# Altium PCB {TEX137}_F2837x_controlCARD_R1.3_PCB_PADS.PcbDoc (part 5 of 6)
Units mm, origin at the board's own origin, x right, y up, seen from the top; angles counter-clockwise.
Board outline 105.77 x 51.09 mm, 10 copper layers (Primary Side, Inner Layer 2, Inner Layer 3, Inner Layer 4, Inner Layer 5, Inner Layer 6, Inner Layer 7, Inner Layer 8, Inner Layer 9, Secondary Side), stack 1.634 mm thick; 292 components, 317 nets, 1400 pads, 1032 vias.
Unrouted connection lines stored in the file: 106.
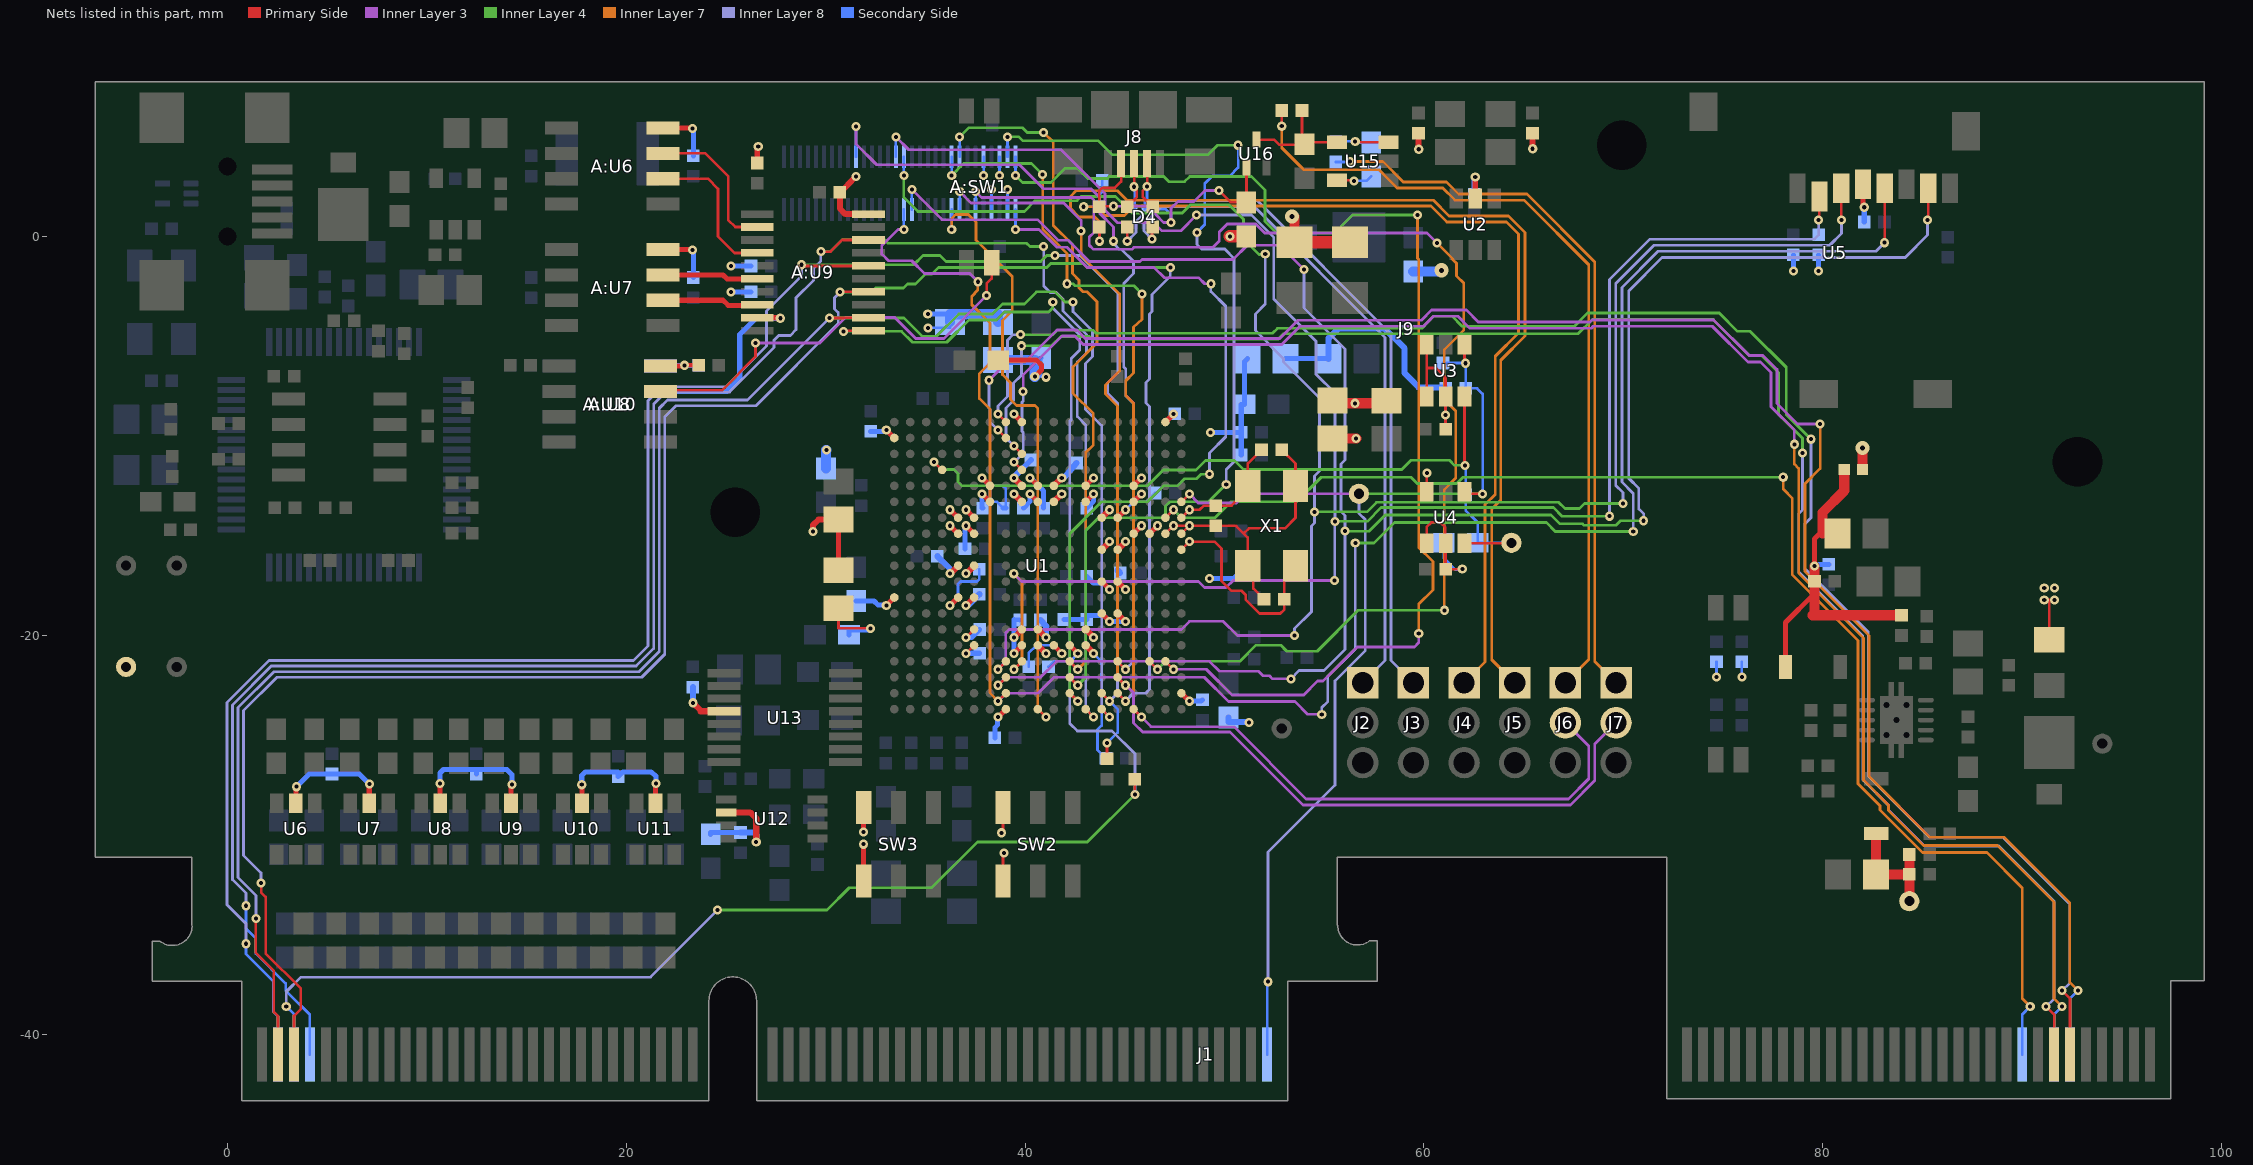
[diagram p13: the nets of this part, all layers, seen from the top]

## Via types
v1: diameter 0.457, hole 0.203, Primary Side to Secondary Side, 1025 vias
v2: diameter 0.711, hole 0.254, Primary Side to Secondary Side, 7 vias

## Nets (pads, with @x,y where several pads share a name; then routed paths per layer and width w, separated by ;. In a path a pad name is that pad's centre, name@x,y a point inside that pad or via, vN(x,y) a via of type N, cw(c..) or ccw(c..) an arc to the next point about the centre after c; other vN are vias at no path point) (continued)
MCU_GPIO-115: J9.59 U1.V12 | length 39.5
  Primary Side w0.135: U1.V12@42.24,-22.91 v1(42.64,-23.31)
  Inner Layer 3 w0.14: v1(39.521,0.352) 40.695,0.352 41.593,-0.547 42.101,-0.547 43.117,-1.563 46.47,-1.563 46.978,-2.071 48.705,-2.071 49.01,-2.376 v1(49.315,-2.376)
  Inner Layer 4 w0.14: v1(42.64,-23.31) 42.24,-22.91 42.24,-14.91 43.839,-13.311 46.141,-13.311 46.941,-12.51 47.641,-12.51 47.997,-12.155 48.59,-12.155 48.819,-11.926 v1(49.251,-11.926)
  Inner Layer 8 w0.14: v1(49.251,-11.926) 49.251,-10.859 50.064,-10.047 50.064,-3.507 49.315,-2.758 v1(49.315,-2.376)
  Secondary Side w0.135: J9.59@39.52,1.352 39.52,0.353 v1(39.521,0.352)
MCU_GPIO-116: J9.43 U1.W10 | length 30.8
  Primary Side w0.114: U1.W10@40.64,-23.71 v1(41.04,-24.11)
  Inner Layer 7 w0.14: v1(36.321,0.352) 36.321,0.902 36.517,1.098 37.152,1.098 37.533,0.717 37.533,-0.189 39.358,-2.015 39.358,-3.721 38.862,-4.217 38.862,-6.935 39.268,-7.341 39.268,-8.179 39.573,-8.484 40.502,-8.484 40.64,-8.622 40.64,-23.71 v1(41.04,-24.11)
  Secondary Side w0.135: J9.43@36.32,1.352 36.32,0.353 v1(36.321,0.352)
MCU_GPIO-117: J9.58 U1.U12 | length 49.9
  Primary Side w0.135: U1.U12@42.24,-22.11 v1(42.64,-22.51)
  Inner Layer 4 w0.14: v1(39.121,4.992) 39.688,4.992 39.88,4.8 43.663,4.8 44.374,4.089 49.162,4.089 49.645,4.571 v1(50.686,4.571) ; v1(42.64,-22.51) 43.041,-22.109 43.041,-14.744 43.674,-14.111 46.841,-14.111 47.041,-13.911 47.041,-13.526 47.256,-13.312 49.186,-13.312 50.064,-12.434 v1(50.089,-12.434)
  Inner Layer 8 w0.14: v1(48.615,0.19) 48.615,-0.407 48.844,-0.636 50.012,-0.636 50.482,-1.106 50.482,-11.304 50.089,-11.697 v1(50.089,-12.434)
  Secondary Side w0.135: J9.58@39.12,3.992 v1(39.121,4.992) ; v1(48.615,0.19) 49.01,0.585 49.01,2.642 49.402,3.034 50.266,3.034 50.686,3.454 v1(50.686,4.571)
MCU_GPIO-118: J9.46 U1.T12 | length 35.5
  Primary Side w0.135: U1.T12@42.24,-21.31 v1(42.64,-21.71)
  Inner Layer 4 w0.14: v1(36.72,4.992) 37.181,5.452 39.86,5.452 40.106,5.206 v1(40.932,5.206)
  Inner Layer 7 w0.14: v1(40.932,5.206) 41.415,4.724 41.415,0.546 42.376,-0.415 42.376,-1.868 42.711,-2.203 42.711,-2.579 42.914,-2.782 43.117,-2.782 43.613,-3.277 43.613,-5.335 42.406,-6.541 42.406,-7.876 43.421,-8.891 43.421,-10.466 43.04,-10.847 43.04,-21.31 v1(42.64,-21.71)
  Secondary Side w0.135: J9.46@36.72,3.992 v1(36.72,4.992)
MCU_GPIO-119: J9.20 U1.T15 | length 41.3
  Primary Side w0.135: U1.T15@44.64,-21.31 v1(45.04,-21.71)
  Inner Layer 3 w0.14: v1(31.52,5.516) 31.52,4.633 32.561,3.592 39.715,3.592 40.92,2.387 43.308,2.387 43.746,1.949 43.746,1.162 44.438,0.469 v1(44.438,-0.242)
  Inner Layer 8 w0.14: v1(44.438,-0.242) 44.438,-0.344 44.743,-0.649 44.845,-0.649 45.441,-1.245 45.441,-1.868 44.946,-2.362 44.946,-6.541 45.048,-6.643 45.048,-7.977 45.441,-8.37 45.441,-21.31 v1(45.04,-21.71)
  Secondary Side w0.135: J9.20@31.52,3.992 v1(31.52,5.516)
MCU_GPIO-120: J7.2 J9.45 U1.U15 | length 63.7
  Primary Side w0.142: U1.U15@44.64,-22.11 v1(45.04,-22.51)
  Inner Layer 3 w0.14: v1(36.721,2.252) 37.298,1.675 41.936,1.675 42.813,0.799 v1(42.813,0.266) ; 45.441,-24.395 45.441,-22.884
  Inner Layer 3 w0.142: v1(45.04,-22.51) 45.067,-22.51 45.441,-22.884 ; 45.441,-24.395 45.9,-24.854 50.28,-24.854 53.937,-28.512 67.348,-28.512 68.568,-27.293 68.568,-25.458 J7.2@69.635,-24.391
  Inner Layer 7 w0.14: v1(42.813,0.266) 42.813,-0.953 44.743,-2.884 44.743,-6.745 44.032,-7.456 44.032,-7.902 44.64,-8.51 44.64,-22.174 v1(45.04,-22.51)
  Secondary Side w0.135: J9.45@36.72,1.352 v1(36.721,2.252)
MCU_GPIO-121: J6.2 J9.44 U1.W16 | length 66.2
  Primary Side w0.142: U1.W16@45.44,-23.71 v1(45.84,-24.11)
  Inner Layer 3 w0.142: v1(45.84,-24.11) 46.317,-24.587 50.469,-24.587 54.09,-28.207 67.252,-28.207 68.263,-27.196 68.263,-25.559 J6.2@67.095,-24.391
  Inner Layer 4 w0.14: v1(36.321,3.052) 36.921,3.652 40.327,3.652 v1(40.881,3.098) ; v1(42.101,-2.376) 42.406,-2.376 42.508,-2.477 45.454,-2.477 v1(45.861,-2.884)
  Inner Layer 7 w0.14: v1(40.881,3.098) 40.881,0.369 42.101,-0.852 v1(42.101,-2.376) ; v1(45.84,-24.11) 45.441,-23.711 45.441,-8.37 45.048,-7.977 45.048,-7.239 45.441,-6.846 45.441,-4.547 45.861,-4.166 v1(45.861,-2.884)
  Secondary Side w0.135: v1@36.32,3.052 J9.44@36.32,3.992
MCU_GPIO-122: J9.32 U1.T8 U5.3 | length 103.7
  Primary Side w0.135: v1(38.64,-21.71) U1.T8@39.04,-21.31 ; U5.3@80.924,2.413 80.924,0.826 v1(80.938,0.826)
  Inner Layer 3 w0.14: v1(38.64,-21.71) 39.028,-21.322 39.028,-19.875 39.193,-19.71 47.843,-19.71 48.248,-19.304 49.937,-19.304 50.649,-20.016 v1(53.518,-20.016)
  Inner Layer 4 w0.14: v1(33.921,3.052) 33.921,1.952 34.621,1.252 39.968,1.252 40.506,1.79 42.609,1.79 42.813,1.993 44.54,1.993 45.365,1.168 47.88,1.168 48.299,1.587 50.229,1.587 50.96,0.856 50.96,-0.122 51.74,-0.902 52.032,-0.902 v1(52.044,-0.89) ; v1(54.509,-13.813) 57.14,-13.813 57.615,-13.338 66.764,-13.338 67.079,-13.652 67.806,-13.652 68.06,-13.398 v1(69.991,-13.398)
  Inner Layer 8 w0.14: v1(52.044,-0.89) 52.044,-3.392 51.55,-3.886 51.55,-4.725 52.96,-6.135 52.96,-6.3 54.763,-8.103 54.763,-11.76 54.509,-12.014 v1(54.509,-13.813) 54.509,-14.377 54.356,-14.53 54.356,-18.821 53.505,-19.672 53.505,-20.168 v1(53.518,-20.016) ; v1(69.991,-13.398) 69.991,-12.852 69.622,-12.484 69.622,-2.362 71.54,-0.444 80.354,-0.444 80.938,0.14 v1(80.938,0.826)
  Secondary Side w0.135: v1(33.921,3.052) J9.32@33.921,3.992
MCU_GPIO-123: J9.33 U1.U8 U5.7 | length 108.5
  Primary Side w0.135: v1(38.64,-22.51) U1.U8@39.04,-22.11 ; v1(85.256,0.826) 85.293,0.826 U5.7@85.293,2.413
  Inner Layer 3 w0.14: v1(34.321,2.352) 35.835,0.837 40.616,0.837 41.644,-0.191 42.152,-0.191 43.219,-1.258 45.759,-1.258 45.861,-1.157 50.433,-1.157 51.144,-0.445 52.769,-0.445 v1(53.989,-1.665) ; v1(38.64,-22.51) 39.04,-22.11 40.78,-22.11 41.58,-21.31 49.252,-21.31 49.748,-21.806 51.701,-21.806 51.929,-22.035 52.26,-22.035 52.412,-22.187 v1(53.326,-22.187)
  Inner Layer 4 w0.14: v1(56.048,-14.783) 56.04,-14.79 56.04,-14.787 57.247,-14.787 58.064,-13.971 66.372,-13.971 66.815,-14.414 67.948,-14.414 68.022,-14.488 69.637,-14.488 69.864,-14.262 v1(71.019,-14.262)
  Inner Layer 8 w0.14: v1(53.326,-22.187) 53.745,-21.768 54.99,-21.768 56.048,-20.71 v1(56.048,-14.783) 56.048,-14.004 55.848,-13.804 55.848,-11.409 56.048,-11.209 56.048,-5.642 53.989,-3.583 v1(53.989,-1.665) ; v1(71.019,-14.262) 71.019,-13.906 70.778,-13.665 70.778,-12.636 70.27,-12.128 70.27,-2.73 71.946,-1.054 84.138,-1.054 85.256,0.064 v1(85.256,0.826)
  Secondary Side w0.135: J9.33@34.32,1.352 v1(34.321,2.352)
MCU_GPIO-124: J9.31 U1.V8 U5.5 | length 101.6
  Primary Side w0.135: v1(38.64,-23.31) U1.V8@39.04,-22.91 ; v1(83.097,-0.317) 83.109,-0.305 U5.5@83.109,2.413
  Inner Layer 3 w0.14: v1(33.921,0.352) 33.626,0.352 32.817,-0.458 32.817,-0.89 33.147,-1.22 34.315,-1.22 34.963,-1.868 37.225,-1.868 v1(37.631,-2.274) ; v1(38.64,-23.31) 39.039,-22.911 40.653,-22.911 41.454,-22.11 48.983,-22.11 50.203,-23.33 53.531,-23.33 54.166,-23.965 54.864,-23.965 v1(54.877,-23.978)
  Inner Layer 4 w0.14: v1(56.558,-15.375) 56.558,-15.38 57.498,-15.38 58.526,-14.352 66.143,-14.352 66.586,-14.795 v1(70.499,-14.795)
  Inner Layer 7 w0.14: v1(37.631,-2.274) 37.631,-2.68 37.325,-3.023 37.325,-3.43 38.24,-4.349 38.24,-6.35 37.706,-6.884 37.706,-8.128 38.24,-8.662 38.24,-22.897 v1(38.64,-23.31)
  Inner Layer 8 w0.14: v1(54.877,-23.978) 54.877,-23.634 55.181,-23.33 55.181,-22.059 56.558,-20.682 v1(56.558,-15.375) ; v1(70.499,-14.795) 70.499,-12.89 69.927,-12.319 69.927,-2.565 71.743,-0.749 82.665,-0.749 v1(83.097,-0.317)
  Secondary Side w0.135: v1@33.92,0.352 J9.31@33.92,1.352
MCU_GPIO-125: J9.30 R15.2 U1.T9 U5.2 | length 104.1
  Primary Side w0.135: v1(39.44,-21.71) U1.T9@39.84,-21.31 ; v1(79.795,0.826) 79.832,0.953 U5.2@79.832,2.007
  Inner Layer 3 w0.14: v1(33.52,4.992) 34.169,4.343 41.808,4.343 44.006,2.145 44.006,1.307 44.628,0.685 46.457,0.685 46.864,0.279 47.804,0.279 v1(48.604,1.079) ; v1(39.434,-16.916) 39.824,-17.306 48.696,-17.306 48.999,-17.61 50.081,-17.61 50.44,-17.251 v1(55.524,-17.251)
  Inner Layer 4 w0.14: v1(55.538,-14.29) 57.162,-14.29 57.856,-13.597 66.492,-13.597 66.928,-14.033 v1(69.305,-14.033)
  Inner Layer 7 w0.14: v1(39.434,-16.916) 39.84,-17.322 39.84,-21.31 v1(39.44,-21.71)
  Inner Layer 8 w0.14: v1(48.604,1.079) 51.347,1.079 52.465,-0.039 52.465,-3.131 54.592,-5.259 54.592,-6.913 55.538,-7.859 v1(55.538,-14.29) 55.524,-14.305 v1(55.524,-17.251) ; v1(69.305,-14.033) 69.305,-2.171 71.337,-0.139 79.592,-0.139 79.795,0.064 v1(79.795,0.826)
  Secondary Side w0.135: J9.30@33.52,3.992 v1(33.52,4.992) ; R15.2@79.795,0.088 v1(79.795,0.826)
MCU_GPIO-133: J1.164 U1.G18 | length 68.5
  Primary Side w0.135: U1.G18@47.04,-14.11 v1(47.44,-13.71)
  Inner Layer 4 w0.14: v1(47.44,-13.71) 47.84,-14.11 49.517,-14.11 50.318,-13.309 53.62,-13.309 54.852,-12.077 59.347,-12.077 59.665,-12.396 61.644,-12.396 61.963,-12.077 v1(78.017,-12.077)
  Inner Layer 7 w0.14: v1(78.017,-12.077) 78.017,-12.677 78.476,-13.136 78.476,-16.974 81.762,-20.259 81.762,-27.448 82.868,-28.555 82.868,-28.765 85.002,-30.899 88.228,-30.899 90.003,-32.674 90.003,-38.223 v1(90.404,-38.623)
  Secondary Side w0.135: J1.164@90.005,-41.024 90.005,-39.022 v1(90.404,-38.623)
MCU_GPIO-136: J9.49 U1.T17 | length 64.4
  Primary Side w0.135: U1.T17@46.24,-21.31 v1(46.64,-21.71)
  Inner Layer 3 w0.14: v1(37.521,2.252) 37.818,1.955 43.308,1.955 43.448,1.815 43.448,0.19 43.219,-0.039 43.219,-0.445 43.422,-0.649 45.353,-0.649 45.454,-0.547 49.427,-0.547 49.732,-0.242 49.732,0.207 50.138,0.614 51.568,0.614 52.018,0.164 60.161,0.164 v1(60.655,-0.33)
  Inner Layer 4 w0.14: v1(46.64,-21.71) 47.04,-21.31 50.762,-21.31 51.574,-20.498 52.82,-20.498 53.124,-20.803 54.648,-20.803 56.701,-18.751 v1(61.024,-18.751)
  Inner Layer 7 w0.14: v1(60.655,-0.33) 61.455,-1.13 61.417,-1.13 61.633,-1.346 61.633,-1.981 62.001,-2.349 62.001,-4.687 61.024,-5.664 61.024,-8.175 61.594,-8.744 61.594,-12.127 61.024,-12.696 v1(61.024,-18.751)
  Secondary Side w0.135: J9.49@37.52,1.352 v1(37.521,2.252)
MCU_GPIO-137: J9.60 U1.T18 | length 61
  Primary Side w0.135: U1.T18@47.04,-21.31 v1(47.44,-21.71)
  Inner Layer 3 w0.14: v1(47.44,-21.71) 49.085,-21.71 50.375,-23 53.974,-23 54.673,-22.302 54.939,-22.302 56.655,-20.586 59.525,-20.586 59.742,-20.37 v1(59.742,-19.91)
  Inner Layer 4 w0.14: v1(39.521,3.052) 39.868,2.706 41.29,2.706 42,3.415 42.621,3.415 43.129,2.907 44.133,2.907 44.222,2.996 46.952,2.996 47.206,2.742 47.994,2.742 48.261,3.009 51.347,3.009 52.026,2.33 52.026,0.742 52.604,0.164 55.513,0.164 56.427,1.079 v1(59.678,1.079)
  Inner Layer 7 w0.14: v1(59.678,1.079) 59.678,-1.093 59.742,-1.157 59.742,-15.596 60.452,-16.307 60.452,-17.731 59.742,-18.441 v1(59.742,-19.91)
  Secondary Side w0.135: J9.60@39.52,3.992 39.52,3.052 v1(39.521,3.052)
MCU_GPIO-161: J1.167 U1.C9 | length 88.4
  Primary Side w0.135: v1(39.44,-10.51) U1.C9@39.84,-10.91 ; v1(91.204,-38.623) 91.603,-39.023 J1.167@91.603,-41.024
  Inner Layer 4 w0.14: v1(39.827,-5.487) 41.327,-5.487 41.797,-5.017 43.219,-5.017 43.36,-5.159 52.691,-5.159 52.97,-4.879 67.74,-4.879 68.448,-4.171 74.505,-4.171 76.323,-5.989 76.958,-5.989 77.788,-6.819 77.788,-8.928 78.982,-10.121 v1(78.982,-10.858)
  Inner Layer 8 w0.14: v1(39.44,-10.51) 39.04,-10.11 39.04,-8.61 39.21,-8.439 39.421,-8.229 39.421,-7.36 39.819,-6.962 39.819,-6.162 39.827,-5.781 v1(39.827,-5.487) ; v1(78.982,-10.858) 78.982,-13.728 78.792,-13.918 78.792,-16.817 82.003,-20.028 82.003,-27.232 83.3,-28.529 83.3,-28.765 85.104,-30.568 88.835,-30.568 91.604,-33.337 91.604,-38.236 v1(91.204,-38.623)
MCU_GPIO-162: J1.168 U1.D9 | length 88.1
  Primary Side w0.135: v1(39.44,-11.31) U1.D9@39.84,-11.71
  Inner Layer 3 w0.14: v1(39.903,-7.773) 39.903,-6.947 41.852,-4.998 42.489,-4.998 42.914,-5.424 52.871,-5.424 53.785,-4.509 59.983,-4.509 60.491,-4.001 61.698,-4.001 62.307,-4.611 68.389,-4.611 68.492,-4.508 74.461,-4.508 76.249,-6.296 76.884,-6.296 77.407,-6.819 77.407,-8.547 78.576,-9.715 v1(78.576,-10.426)
  Inner Layer 7 w0.14: v1(78.576,-10.426) 78.576,-11.419 78.794,-11.637 78.794,-16.887 82.041,-20.135 82.041,-27.27 83.3,-28.529 83.3,-28.79 85.053,-30.543 88.761,-30.543 91.604,-33.386 91.604,-38.223 v1(92.004,-38.623)
  Inner Layer 8 w0.14: v1(39.44,-11.31) 39.903,-10.91 39.903,-9.83 39.852,-9.78 39.852,-8.306 39.903,-8.256 v1(39.903,-7.773)
  Secondary Side w0.135: J1.168@91.605,-41.024 91.605,-39.022 v1(92.004,-38.623)
MCU_GPIO-163: J1.169 U1.A8 | length 88.8
  Primary Side w0.135: v1(38.641,-8.91) U1.A8@39.04,-9.31 ; v1(92.004,-37.823) 92.403,-38.223 J1.169@92.403,-41.024
  Inner Layer 4 w0.14: v1(39.776,-4.928) 41.39,-4.928 41.606,-4.713 43.422,-4.713 43.569,-4.859 52.404,-4.859 52.652,-4.611 59.89,-4.611 60.487,-4.001 61.407,-4.001 61.913,-4.508 67.547,-4.508 68.212,-3.843 74.812,-3.843 75.731,-4.762 76.366,-4.762 78.169,-6.565 78.169,-8.928 v1(79.414,-10.172)
  Inner Layer 8 w0.14: v1(38.641,-8.91) 38.641,-8.51 39.116,-8.035 39.116,-5.208 39.395,-4.928 v1(39.776,-4.928) ; v1(79.414,-10.172) 79.414,-14.109 79.097,-14.426 79.097,-16.665 82.283,-19.85 82.283,-27.054 85.365,-30.137 89.038,-30.137 92.391,-33.489 92.391,-37.436 v1(92.004,-37.823)
MCU_GPIO-164: J1.170 U1.B8 | length 90.1
  Primary Side w0.135: v1(38.641,-9.71) U1.B8@39.04,-10.11
  Inner Layer 3 w0.14: v1(38.189,-7.214) 39.097,-6.306 39.991,-6.306 41.598,-4.7 42.596,-4.7 43.016,-5.119 52.769,-5.119 53.684,-4.205 59.881,-4.205 60.389,-3.697 62.129,-3.697 62.726,-4.293 68.326,-4.293 68.423,-4.196 74.53,-4.196 76.313,-5.979 77.011,-5.979 77.7,-6.667 77.7,-8.382 78.728,-9.41 v1(79.871,-9.41)
  Inner Layer 7 w0.14: v1(79.871,-9.41) 79.871,-11.645 79.109,-12.407 79.109,-16.799 82.321,-20.011 82.321,-27.074 85.383,-30.137 89.103,-30.137 92.39,-33.423 92.39,-37.423 92.404,-37.423 v1(92.804,-37.823)
  Inner Layer 8 w0.14: v1@38.188,-7.215 38.188,-8.636 38.24,-8.688 38.24,-9.309 v1(38.641,-9.71)
  Secondary Side w0.135: J1.170@92.405,-41.024 92.405,-38.222 v1(92.804,-37.823)
MCU_GPIO-168: C5.2 R19.2 TP3.1 U1.D4 U3.6 U4.6 | length 40.6
  Primary Side w0.135: v1(35.44,-11.31) U1.D4@35.84,-11.71 ; U4.6@62.037,-15.392 64.364,-15.392 TP3.1@64.389,-15.367 ; U3.6@62.037,-8.026 62.037,-11.453 v1(62.065,-11.481)
  Inner Layer 4 w0.14: v1(35.44,-11.31) 35.826,-11.696 36.439,-11.696 36.639,-11.896 36.639,-12.31 36.839,-12.51 46.127,-12.51 46.928,-11.709 48.578,-11.709 49.046,-11.24 50.497,-11.24 50.953,-11.696 58.89,-11.696 59.359,-11.227 61.278,-11.227 61.532,-11.481 v1(62.065,-11.481)
  Secondary Side w0.135: v1(62.065,-11.481) 62.103,-11.519 C5.2@62.103,-12.954 62.091,-12.966 62.091,-13.742 62.7,-14.352 R19.2@62.7,-15.367 TP3.1@64.389,-15.367
MCU_TCK: A:U9.14 J1.5 U1.V15 | length 107.6
  Primary Side w0.135: v1(1.69,-32.424) 1.69,-32.896 1.918,-33.124 1.918,-35.96 3.68,-37.722 3.68,-38.741 3.335,-39.085 J1.5@3.335,-41.024 ; v1(30.723,-2.797) 30.738,-2.781 A:U9.14@32.158,-2.781 ; U1.V15@44.64,-22.91 v1(45.04,-23.31)
  Inner Layer 4 w0.14: v1(30.723,-2.797) 31.649,-2.797 31.784,-2.662 32.44,-2.662 32.51,-2.592 33.903,-2.592 34.106,-2.388 34.506,-2.388 35.002,-1.893 35.326,-1.893 35.656,-1.563 41.085,-1.563 41.289,-1.36 42.914,-1.36 43.117,-1.563 v1(47.283,-1.563)
  Inner Layer 8 w0.14: v1(1.69,-32.424) 1.69,-31.916 0.814,-31.04 0.814,-23.774 2.477,-22.11 20.778,-22.11 21.933,-20.955 21.933,-9.05 22.492,-8.491 26.512,-8.491 30.626,-4.377 30.626,-3.818 30.441,-3.633 30.441,-3.078 v1(30.723,-2.797) ; v1(45.04,-23.31) 45.426,-22.91 46.049,-22.91 46.24,-22.719 46.241,-8.535 46.063,-8.357 46.063,-7.329 46.241,-7.15 46.241,-3.893 46.369,-3.765 46.369,-2.91 47.283,-1.995 v1(47.283,-1.563)
MCU_TDI: A:U9.18 J1.8 U1.W13 | length 107
  Primary Side w0.135: v1(29.758,-0.765) 30.24,-0.765 30.824,-0.181 A:U9.18@32.158,-0.181 ; U1.W13@43.04,-23.71 v1(43.44,-24.11)
  Inner Layer 4 w0.14: v1(29.758,-0.765) 30.249,-0.765 30.849,-0.165 32.94,-0.165 33.119,-0.344 40.08,-0.344 40.244,-0.509 40.908,-0.509 v1(40.933,-0.509)
  Inner Layer 8 w0.14: v1(0.928,-33.567) 0.928,-32.932 0.255,-32.259 0.255,-23.494 2.198,-21.551 20.499,-21.551 21.374,-20.676 21.374,-8.416 21.967,-7.823 25.171,-7.812 27.406,-5.577 27.406,-5.208 27.648,-4.966 28.232,-4.966 28.518,-4.679 28.518,-3.08 29.388,-2.21 29.388,-1.614 29.758,-1.244 v1(29.758,-0.765) ; v1(40.933,-0.509) 40.933,-2.477 41.263,-2.808 41.568,-2.808 41.898,-3.138 41.898,-3.736 43.078,-4.916 43.078,-5.849 42.621,-6.307 42.621,-9.031 43.04,-9.45 43.04,-23.71 v1(43.44,-24.11)
  Secondary Side w0.135: v1(0.928,-33.567) 0.928,-34.71 1.427,-35.209 1.427,-35.971 2.921,-37.465 2.921,-37.819 4.135,-39.033 J1.8@4.135,-41.024
MCU_TDO: A:U9.11 J1.6 R10.1 | length 91.6
  Primary Side w0.135: v1(30.9,-4.762) 30.931,-4.731 A:U9.11@32.158,-4.731 ; v1(45.505,-27.979) R10.1@45.505,-27.217
  Inner Layer 4 w0.14: v1(24.571,-33.785) 30.058,-33.785 31.181,-32.662 35.316,-32.662 37.613,-30.365 43.119,-30.365 v1(45.505,-27.979) ; v1(30.9,-4.762) 33.806,-4.762 34.353,-5.309 36.072,-5.309 37.19,-4.192 38.57,-4.192 38.963,-3.798 41.187,-3.798 41.39,-3.595 41.39,-3.324 v1(41.39,-3.29)
  Inner Layer 8 w0.14: v1(2.951,-38.611) 2.951,-37.879 3.683,-37.147 21.209,-37.147 v1(24.571,-33.785) ; v1(41.39,-3.29) 41.39,-3.596 42.74,-4.946 42.74,-5.694 42.316,-6.118 42.316,-9.196 42.24,-9.272 42.24,-24.423 42.621,-24.804 44.363,-24.804 45.505,-25.946 v1(45.505,-27.979)
  Secondary Side w0.135: v1(2.951,-38.611) 3.335,-38.992 J1.6@3.335,-41.024
MCU_TMS: A:U9.12 J1.3 U1.W14 | length 101.2
  Primary Side w0.135: v1(1.427,-34.202) 1.427,-35.928 2.328,-36.829 2.328,-38.9 2.535,-39.106 J1.3@2.535,-41.024 ; v1(30.189,-4.092) 30.889,-4.092 30.9,-4.081 A:U9.12@32.158,-4.081 ; U1.W14@43.84,-23.71 v1(44.24,-24.11)
  Inner Layer 4 w0.14: v1(30.189,-4.092) 33.921,-4.092 34.834,-5.005 35.572,-5.005 36.677,-3.9 38.354,-3.9 38.862,-3.392 39.968,-3.392 40.578,-2.781 41.491,-2.781 42,-3.29 v1(42.406,-3.29)
  Inner Layer 8 w0.14: v1(1.427,-34.202) 1.427,-33.05 0.534,-32.157 0.534,-23.634 2.338,-21.831 20.638,-21.831 21.653,-20.815 21.653,-8.619 22.073,-8.2 26.082,-8.2 v1(30.189,-4.092) ; v1(42.406,-3.29) 42.406,-3.775 43.375,-4.744 43.375,-6.023 43.027,-6.371 43.027,-8.675 43.84,-9.488 43.84,-23.71 v1(44.24,-24.11)
MCU_TRSTN: A:U9.16 J1.4 R9.2 U1.V14 | length 110.6
  Primary Side w0.135: v1(28.791,-1.423) 28.811,-1.481 A:U9.16@32.158,-1.481 ; U1.V14@43.84,-22.91 v1(44.24,-23.31) ; R9.2@44.108,-26.201 v1(44.108,-25.412)
  Inner Layer 4 w0.14: v1(28.791,-1.423) 34.418,-1.423 34.888,-0.953 35.739,-0.953 36.044,-1.258 40.781,-1.258 41.085,-0.953 v1(41.492,-0.953)
  Inner Layer 8 w0.14: v1(0.928,-35.472) 0.928,-34.467 -0.025,-33.514 -0.025,-23.382 2.085,-21.272 20.359,-21.272 21.095,-20.536 21.095,-8.242 21.793,-7.544 24.982,-7.544 27.038,-5.488 27.038,-3.738 28.791,-1.985 v1(28.791,-1.423) ; v1(41.492,-0.953) 42.748,-0.953 44.653,-2.858 44.653,-6.834 44.133,-7.354 44.133,-7.862 44.64,-8.369 44.64,-22.91 v1(44.24,-23.31)
  Secondary Side w0.135: v1(0.928,-35.472) 0.928,-35.98 2.302,-37.354 2.302,-38.886 2.535,-39.119 J1.4@2.535,-41.024 ; v1(44.108,-25.412) 44.641,-24.879 44.641,-23.711 v1(44.24,-23.31)
MCU_X1: C7.2 R24.1 U1.G19 X1.1 | length 6.2
  Primary Side w0.135: U1.G19@47.84,-14.11 v1(48.24,-13.71) 48.756,-13.71 48.965,-13.501 R24.1@49.569,-13.501 50.356,-13.501 51.144,-12.714 51.144,-12.536 X1.1@51.163,-12.517 51.169,-12.511 51.169,-11.393 C7.2@51.855,-10.707
MCU_X2: C8.2 U1.J19 X1.3 | length 10.4
  Primary Side w0.135: U1.J19@47.84,-15.71 v1(48.241,-15.31) 49.498,-15.31 49.848,-15.66 49.848,-17.286 50.331,-17.768 50.839,-17.768 51.068,-17.997 51.068,-18.226 51.753,-18.911 52.795,-18.911 52.998,-18.708 C8.2@52.998,-18.2 52.998,-17.082 X1.3@53.563,-16.517
MCU_XRSN: C3.2 J1.120 R18.2 TP2.1 U1.F19 U3.1 U4.1 | length 56.3
  Primary Side w0.135: U1.F19@47.84,-13.31 v1(48.24,-12.91) ; U4.1@62.037,-12.802 62.037,-12.91 v1(62.943,-12.91) ; U3.1@62.037,-5.436 62.037,-6.308 v1(62.091,-6.362)
  Inner Layer 3 w0.14: v1(48.24,-12.91) 48.256,-12.926 48.687,-13.373 50.598,-13.373 51.061,-12.91 TP2.1@56.743,-12.91
  Inner Layer 4 w0.14: TP2.1@56.743,-12.91 v1(62.943,-12.91)
  Inner Layer 8 w0.14: v1(52.185,-37.376) 52.185,-30.873 55.538,-27.52 55.538,-22.287 57.062,-20.763 57.062,-14.21 56.743,-13.89 TP2.1@56.743,-12.91
  Secondary Side w0.135: J1.120@52.138,-41.024 52.138,-37.376 v1(52.185,-37.376) ; C3.2@60.96,-6.35 62.079,-6.35 v1(62.091,-6.362) 62.103,-6.374 R18.2@62.103,-7.62 62.662,-7.62 62.943,-7.902 v1(62.943,-12.91)
MID_SCI-RX: A:SW1.2 A:U10.7 | length 21.4
  Primary Side w0.135: A:U10.7@21.717,-7.775 21.74,-7.724 24.791,-7.724 26.48,-6.035 v1(26.48,-5.346) ; v1(38.074,-2.972) 38.074,-2.36 38.325,-2.109 A:SW1.2@38.325,-1.33
  Inner Layer 3 w0.14: v1(26.48,-5.346) 29.714,-5.346 30.996,-4.065 33.465,-4.065 34.52,-5.119 35.928,-5.119 v1(38.074,-2.972)
MID_TCK: A:U7.7 A:U9.6 | length 4.8
  Primary Side w0.254: A:U7.7@21.839,-1.933 24.855,-1.933 25.053,-2.131 A:U9.6@26.57,-2.131
MID_TDI: A:U6.7 A:U9.2 | length 7.5
  Primary Side w0.135: A:U6.7@21.839,4.163 23.966,4.163 25.109,3.02 25.109,0.828 25.468,0.469 A:U9.2@26.57,0.469
MID_TDO: A:U8.2 A:U9.9 | length 10
  Primary Side w0.254: A:U9.9@26.57,-4.081 27.699,-4.081 v1(27.724,-4.106)
  Secondary Side w0.254: A:U8.2@21.712,-7.775 25.03,-7.775 25.693,-7.112 25.693,-4.919 26.506,-4.106 v1(27.724,-4.106)
MID_TMS: A:U7.6 A:U9.8 | length 4.8
  Primary Side w0.254: A:U7.6@21.839,-3.203 24.855,-3.203 25.109,-3.457 26.544,-3.457 A:U9.8@26.57,-3.431
MID_TRSTN: A:U6.6 A:U9.4 | length 7.7
  Primary Side w0.135: A:U6.6@21.839,2.893 24.093,2.893 24.601,2.385 24.601,0.003 25.435,-0.831 A:U9.4@26.57,-0.831
OSC_GND: C7.1 C8.1 R24.2 U1.H18 U1.H19 X1.2 X1.4 | length 15.9
  Primary Side w0.135: U1.H18@47.04,-14.91 v1(47.44,-14.51) v1(48.24,-14.51) ; U1.H19@47.84,-14.91 v1(48.24,-14.51) ; C8.1@51.982,-18.2 51.449,-17.667 51.449,-16.6 51.169,-16.6 51.169,-16.523 X1.2@51.163,-16.517 51.163,-15.101 50.579,-14.517 ; C7.1@52.871,-10.707 53.563,-11.399 X1.4@53.563,-12.517 53.563,-14.111 53.03,-14.644 51.22,-14.644 50.963,-14.901 50.579,-14.517 ; v1(48.24,-14.51) 49.562,-14.51 R24.2@49.569,-14.517 50.579,-14.517
USB0_EPEN: J6.1 R81.1 | length 41.1
  Primary Side w0.142: v1(52.871,5.525) R81.1@52.871,6.311
  Inner Layer 7 w0.142: v1(52.871,5.525) 52.871,4.443 53.974,3.34 57.747,3.34 58.662,2.425 60.948,2.425 61.557,1.816 65.026,1.816 68.263,-1.421 68.263,-21.223 J6.1@67.095,-22.391
USB0_GPIO-42: J2.1 R76.1 | length 34.5
  Primary Side w0.142: v1(46.369,-0.141) 46.369,0.469 R76.1@46.394,0.469
  Inner Layer 8 w0.142: v1(46.369,-0.141) 45.962,0.266 45.962,0.647 46.8,1.485 51.499,1.485 58.053,-5.068 58.053,-21.273 J2.1@56.935,-22.391
USB0_GPIO-43: J3.1 R77.1 | length 35.8
  Primary Side w0.142: v1(45.124,-0.242) R77.1@45.124,0.469
  Inner Layer 8 w0.142: v1(45.124,-0.242) 45.556,0.19 45.556,0.748 46.597,1.79 51.652,1.79 58.357,-4.916 58.357,-21.273 J3.1@59.475,-22.391
USB0_GPIO-46: J4.1 R79.1 R80.1 | length 48.6
  Inner Layer 7 w0.14: v1(42.94,1.485) 43.573,1.485 44.005,1.041 44.983,1.041 45.466,1.524 60.35,1.524 61.149,0.726 64.144,0.726 64.744,0.126 64.744,-4.843 63.578,-6.009 63.578,-12.94 63.07,-13.448 63.07,-21.336 J4.1@62.015,-22.391
  Secondary Side w0.135: v1(42.94,1.485) 42.953,1.499 R80.1@43.727,1.485 43.727,2.083 43.866,2.222 R79.1@43.866,2.819
USB0_GPIO-47: J5.1 R82.1 | length 51.5
  Primary Side w0.142: v1(43.727,-0.242) R82.1@43.727,0.469
  Inner Layer 7 w0.142: v1(43.727,-0.242) 43.727,0.747 43.497,0.977 42.71,0.977 42.278,1.409 42.278,2.006 42.557,2.285 44.628,2.285 45.098,1.816 60.465,1.816 61.265,1.015 64.244,1.015 65.067,0.192 65.067,-4.998 63.856,-6.21 63.856,-13.222 63.398,-13.679 63.398,-21.234 J5.1@64.555,-22.391
USB0_PFLT: J7.1 R78.1 | length 36.6
  Inner Layer 7 w0.142: v1(56.3,3.747) 57.949,3.747 58.966,2.73 61.127,2.73 61.737,2.12 65.166,2.12 68.568,-1.282 68.568,-21.324 J7.1@69.635,-22.391
  Secondary Side w0.142: R78.1@55.577,3.732 56.285,3.732 v1(56.3,3.747)
USB-DM: D4.2 J8.2 R76.2 | length 3.6
  Primary Side w0.127: J8.2@46.116,3.65 v1(46.116,2.504) 45.911,2.3 45.911,1.968 R76.2@46.394,1.485
  Secondary Side w0.135: D4.2@45.999,1.366 45.999,1.778 46.116,1.895 v1(46.116,2.504)
USB-DP: D4.1 J8.3 R77.2 | length 3.6
  Primary Side w0.127: R77.2@45.124,1.485 45.607,1.968 45.607,2.349 v1(45.466,2.489) J8.3@45.466,3.65
  Secondary Side w0.135: v1(45.466,2.489) 45.499,2.456 D4.1@45.499,1.366
USB-EPEN: R81.2 R86.1 U15.4 U16.3 | length 6.2
  Primary Side w0.135: U16.3@51.601,4.852 52.49,4.852 52.744,4.598 53.99,4.598 R86.1@54.014,4.622 ; R81.2@53.887,6.311 53.887,4.749 R86.1@54.014,4.622 ; U15.4@55.64,4.721 53.915,4.721 53.901,4.735 R86.1@54.014,4.622
USB-ID: D4.3 J8.4 R82.2 R85.2 U16.1 | length 15.1
  Primary Side w0.127: v1(49.721,2.298) 50.318,1.701 R85.2@51.093,1.701
  Primary Side w0.135: v1(44.438,1.51) 43.727,1.51 R82.2@43.727,1.485 43.727,2.25 43.702,2.276 43.854,2.428 44.489,2.428 44.816,2.755 J8.4@44.816,3.65 ; R85.2@51.093,1.701 51.101,1.709 U16.1@51.101,3.452
  Inner Layer 3 w0.14: v1(44.438,1.51) 46.156,1.51 46.944,0.698 v1(47.321,0.698) 47.321,1.41 47.663,1.752 48.477,1.752 49.023,2.298 v1(49.721,2.298)
  Secondary Side w0.135: D4.3@46.499,1.366 47.034,1.366 47.321,1.079 v1(47.321,0.698)
USB-PFLT: R78.2 R84.2 U15.3 | length 3.5
  Primary Side w0.135: v1(56.554,4.763) 56.554,4.721 U15.3@58.23,4.721
  Secondary Side w0.135: R78.2@55.577,4.748 55.592,4.763 v1(56.554,4.763) 56.607,4.71 R84.2@57.355,4.71
USB_5V0: C93.1 C94.1 R62.1 R83.1 R84.1 U15.5 | length 9.7
  Primary Side w0.135: U15.5@55.64,2.821 56.452,2.821 v1(56.494,2.779) ; v1(91.108,-18.233) 91.352,-18.233 R62.1@91.352,-20.232
  Primary Side w0.508: v2(53.391,0.991) 53.506,0.991 C93.1@53.506,-0.293
  Primary Side w0.635: C93.1@53.506,-0.293 C94.1@56.3,-0.293
  Secondary Side w0.135: v1(56.494,2.779) 56.498,2.782 57.129,2.782 R84.1@57.355,3.008
  Secondary Side w0.508: R83.1@59.461,-1.765 60.884,-1.765 v2(60.884,-1.702)
  other v1: 91.616,-18.233 91.108,-17.624 91.616,-17.624
VDD_1V2: C69.2 C70.2 C74.2 D2.2 L2.2 L4.1 R72.1 TP6.1 U4.3 | length 11
  Primary Side w0.135: U4.3@60.137,-12.802 60.137,-11.872 v1(60.147,-11.862)
  Primary Side w0.305: C74.2@58.115,-8.37 C74.2@58.115,-8.242
  Primary Side w0.508: L4.1@55.411,-8.229 55.411,-8.37 v1(56.542,-8.37) C74.2@58.115,-8.37 ; D2.2@81.991,-11.684 v2(81.991,-10.617) ; L2.2@82.677,-29.95 82.677,-31.99 C70.2@82.678,-31.991 C69.2@84.342,-31.991 ; TP6.1@84.342,-33.337 C69.2@84.342,-31.991 ; R72.1@84.342,-31 C69.2@84.342,-31.991
VDD_3V3: A:C21.2 A:C23.2 A:C24.2 A:C26.2 A:C28.2 A:R17.2 A:U6.8 A:U7.8 A:U8.1 A:U9.20 A:U10.8 C1.2 C2.2 C4.2 C6.2 C48.2 C71.2 C78.2 C79.2 C82.2 C91.2 D2.1 J9.52 J9.53 J9.56 J9.57 L1.2 L3.1 L5.1 L6.1 R1.1 R2.2 R12.1 R13.1 R14.1 R15.1 R16.1 R18.1 R19.1 R20.1 R21.1 R63.1 R66.1 R67.1 R85.1 TP5.1 U1.R11 U1.R12 U2.5 U3.3 U3.4 U3.5 U4.4 U4.5 U5.4 | length 93.2
  Primary Side w0.135: v1(50.267,0) v1(50.267,0) ; U4.4@60.137,-15.392 60.137,-14.58 60.376,-14.341 60.808,-14.341 61.072,-14.605 61.072,-15.377 U4.5@61.087,-15.392 C4.2@61.087,-16.688 v1(61.925,-16.688) ; U3.4@60.137,-8.026 60.137,-6.6 ; U3.3@60.137,-5.436 60.137,-6.6 ; C2.2@61.087,-9.677 v1(61.087,-8.966) U3.5@61.087,-8.026 61.086,-8.025 61.086,-7.083 60.603,-6.6 60.137,-6.6
  Primary Side w0.254: A:U10.8@21.717,-6.505 22.876,-6.505 v1(22.917,-6.465) 22.938,-6.443 A:C28.2@23.628,-6.465 ; A:U7.8@21.839,-0.663 23.29,-0.663 v1(23.317,-0.69) ; A:U6.8@21.839,5.433 23.294,5.433 v1(23.317,5.41) ; A:R17.2@26.568,3.683 26.568,4.456 v1(26.62,4.508) ; L5.1@30.646,-16.74 C82.2@30.646,-14.2 ; U1.R11@41.44,-20.51 v1(41.84,-20.91) ; U1.R12@42.24,-20.51 v1(42.64,-20.91) ; U2.5@62.574,1.902 v1(62.574,2.969) ; L1.2@78.127,-21.59 78.127,-19.367 79.524,-17.97 79.524,-17.36 R67.1@79.585,-17.298 79.592,-17.298 v1(79.592,-16.522) 79.592,-15.165 79.859,-14.898 79.985,-14.898 C48.2@80.741,-14.898 C48.2@80.709,-14.898 ; U5.4@82.017,2.616 82.017,1.525 v1(82.081,1.461)
  Primary Side w0.305: v1(29.361,-14.804) 29.361,-14.479 29.64,-14.2 C82.2@30.646,-14.2 ; v1(31.52,3.001) 30.709,2.163 A:C24.2@30.709,2.21 30.71,2.208 30.71,1.397 30.988,1.119 A:U9.20@32.158,1.119 ; R13.1@59.729,5.168 59.729,4.381 v1(59.741,4.369) ; R14.1@65.444,5.168 65.444,4.406 v1(65.456,4.394)
  Primary Side w0.508: v1(79.592,-16.522) 79.592,-18.909 79.502,-18.999 R66.1@83.947,-18.999 ; 79.985,-14.898 79.985,-13.843 81.077,-12.751 D2.1@81.077,-11.684
  Primary Side w0.635: v1(50.267,0) R85.1@51.093,-0.001
  Secondary Side w0.135: v1(35.128,-4.59) 36.234,-4.59 C71.2@36.234,-4.294 ; v1@37.92,3.052 J9.52@37.92,3.992 ; J9.53@38.32,1.352 38.32,2.351 v1(38.321,2.352) ; J9.56@38.72,3.992 38.72,3.052 v1(38.721,3.052) ; J9.57@39.12,1.352 39.12,2.351 v1(39.121,2.352) ; C78.2@40.181,-21.586 40.181,-20.9 40.572,-20.51 41.468,-20.51 41.84,-20.882 v1(41.84,-20.91) ; C79.2@41.172,-21.586 41.477,-21.307 42.269,-21.307 v1(42.64,-20.91) ; R19.1@60.998,-15.367 60.998,-16.129 61.57,-16.7 61.912,-16.7 v1(61.925,-16.688) ; v1(61.087,-8.966) R18.1@61.087,-7.62 ; v1(74.676,-22.098) R20.1@74.676,-21.336 ; v1(75.946,-22.098) R21.1@75.946,-21.336
  Secondary Side w0.254: A:U8.1@21.712,-6.505 21.753,-6.465 v1(22.917,-6.465) A:C26.2@23.628,-6.465 ; v1(23.317,-0.69) 23.363,-0.736 A:C23.2@23.363,-2.06 ; v1(23.317,5.41) 23.363,5.364 A:C21.2@23.363,4.036 ; v1(25.261,-2.782) R2.2@26.252,-2.782 ; v1(25.261,-1.487) R1.1@26.252,-1.487 ; v1(35.121,-3.891) 35.121,-3.899 36.234,-3.899 C71.2@36.234,-4.294 ; v1(49.243,-17.148) 50.458,-17.148 50.839,-16.767 R12.1@50.839,-16.041 ; L6.1@53.062,-6.135 C91.2@55.221,-6.135 ; C1.2@62.523,2.12 62.523,2.918 v1(62.574,2.969) ; v1(78.525,-1.739) R16.1@78.525,-0.928 ; v1(79.592,-16.522) 79.668,-16.446 R63.1@80.303,-16.446 ; v1(79.795,-1.739) R15.1@79.795,-0.928 ; C6.2@82.081,0.723 v1(82.081,1.461)
  Secondary Side w0.305: C91.2@55.221,-6.135 55.221,-5.105 55.703,-4.623 58.039,-4.623 59.03,-5.613 59.03,-6.858 59.741,-7.569 61.036,-7.569 R18.1@61.087,-7.62
  Secondary Side w0.508: C71.2@36.234,-4.294 36.234,-3.908 38.647,-3.908 L3.1@38.647,-4.294
  other v1: 37.921,3.052
VDD_MCU_1V2: C75.2 C84.2 C85.2 C86.2 C87.2 C88.2 C89.2 C90.2 L4.2 U1.E9 U1.E11 U1.F9 U1.F11 U1.G14 U1.G15 U1.J14 U1.J15 U1.K5 U1.K6 U1.P10 U1.P13 U1.R10 U1.R13 | length 24.2
  Primary Side w0.254: U1.G15@44.64,-14.11 v1(45.04,-13.71)
  Primary Side w0.305: v1(36.24,-16.91) U1.K5@36.64,-16.51 ; v1(37.04,-16.91) U1.K6@37.44,-16.51 ; v1(39.44,-12.91) U1.F9@39.84,-13.31 ; v1(39.44,-12.11) U1.E9@39.84,-12.51 ; U1.R10@40.64,-20.51 v1(41.04,-20.91) ; U1.P10@40.64,-19.71 v1(41.04,-20.11) ; U1.F11@41.44,-13.31 v1(41.84,-12.91) ; U1.E11@41.44,-12.51 v1(41.84,-12.11) ; U1.R13@43.04,-20.51 v1(43.44,-20.91) ; U1.P13@43.04,-19.71 v1(43.44,-20.11) ; U1.J14@43.84,-15.71 v1(44.241,-15.311) ; U1.G14@43.84,-14.11 v1(44.241,-13.71) ; U1.J15@44.64,-15.71 v1(45.04,-15.31) ; v1(56.591,-10.135) v1@56.617,-10.134
  Primary Side w0.508: L4.2@55.411,-10.134 v1@56.617,-10.134
  Secondary Side w0.127: C85.2@44.641,-16.752 44.641,-15.709 v1(45.04,-15.31) ; v1(45.04,-13.71) 45.44,-13.31 46.077,-13.31 C86.2@46.521,-12.866
  Secondary Side w0.135: v1(43.44,-20.91) 43.839,-21.309 43.839,-24.532 43.636,-24.736 43.636,-25.753 C84.2@44.057,-26.174
  Secondary Side w0.305: C89.2@35.599,-16.041 36.238,-16.68 36.238,-16.908 v1(36.24,-16.91) ; v1(39.44,-12.11) 39.44,-12.073 C88.2@40.298,-11.215 ; C90.2@40.772,-19.24 41.07,-19.556 41.04,-19.587 v1(41.04,-20.11) ; v1(41.84,-12.11) 41.857,-12.093 41.96,-12.093 C87.2@42.584,-11.367 ; C85.2@44.641,-16.752 C85.2@44.768,-16.879 ; C75.2@50.204,-24.131 50.204,-24.361 51.236,-24.361 v1(51.236,-24.387)
VDD_MCU_3V3: C49.1 C50.1 C51.1 C52.1 C53.1 C54.1 C55.1 C56.1 C57.1 C58.1 C59.1 C60.1 C61.1 C62.1 C63.1 C64.1 C72.2 C73.2 L3.2 R74.1 R75.1 U1.A9 U1.A18 U1.B1 U1.E7 U1.E10 U1.E13 U1.E16 U1.F7 U1.F10 U1.F13 U1.F16 U1.G5 U1.G6 U1.H5 U1.H6 U1.L14 U1.L15 U1.M1 U1.M5 U1.M6 U1.N14 U1.N15 U1.P9 U1.R9 U1.V19 U1.W8 | length 47.4
  Primary Side w0.254: v1(33.04,-18.51) U1.M1@33.44,-18.11 ; v1(33.04,-9.71) U1.B1@33.44,-10.11 ; v1(36.24,-18.51) U1.M5@36.64,-18.11 ; v1(36.24,-14.51) U1.H5@36.64,-14.91 ; v1(36.24,-13.71) U1.G5@36.64,-14.11 ; v1(37.04,-18.51) U1.M6@37.44,-18.11 ; v1(37.04,-14.51) U1.H6@37.44,-14.91 ; v1(37.04,-13.71) U1.G6@37.44,-14.11 ; v1(37.84,-12.91) U1.F7@38.24,-13.31 ; v1(37.84,-12.11) U1.E7@38.24,-12.51 ; v1(38.64,-24.11) U1.W8@39.04,-23.71 ; R74.1@38.66,-6.21 40.581,-6.21 40.822,-6.451 40.822,-6.701 v1(40.487,-7.036) ; v1(39.44,-20.91) U1.R9@39.84,-20.51 ; v1(39.44,-20.11) U1.P9@39.84,-19.71 ; v1(39.44,-8.91) U1.A9@39.84,-9.31 ; v1(40.24,-12.91) U1.F10@40.64,-13.31 ; v1(40.24,-12.11) U1.E10@40.64,-12.51 ; U1.F13@43.04,-13.31 v1(43.44,-12.91) ; U1.E13@43.04,-12.51 v1(43.44,-12.11) ; U1.N14@43.84,-18.91 v1(44.24,-19.31) ; U1.L14@43.84,-17.31 v1(44.24,-17.709) ; U1.N15@44.64,-18.91 v1(45.04,-19.31) ; U1.L15@44.64,-17.31 v1(45.04,-17.709) ; U1.F16@45.44,-13.31 v1(45.84,-12.91) ; U1.E16@45.44,-12.51 v1(45.84,-12.11) ; U1.A18@47.04,-9.31 v1(47.44,-8.91) ; U1.V19@47.84,-22.91 v1(48.24,-23.31)
  Secondary Side w0.127: 38.24,-12.51 38.903,-12.51 39.04,-12.647 C62.1@39.04,-13.628
  Secondary Side w0.135: v1(36.24,-18.51) 36.24,-18.466 36.638,-18.068 36.638,-17.433 36.76,-17.311 37.586,-17.311 37.706,-17.192 C50.1@37.706,-16.688 ; 38.24,-12.51 38.24,-13.106 38.443,-13.31 38.608,-13.31 38.608,-13.335 C62.1@38.901,-13.628 ; C73.2@40.806,-6.097 40.806,-7.036 41.046,-7.036 v1(41.046,-7.062) ; v1(47.44,-8.91) C58.1@47.498,-8.89
  Secondary Side w0.254: C72.2@31.535,-18.289 32.428,-18.289 32.631,-18.492 33.022,-18.492 v1(33.04,-18.51) ; C53.1@32.258,-9.779 33.04,-9.779 v1(33.04,-9.71) ; C64.1@36.99,-15.671 36.996,-14.554 v1(37.04,-14.51) ; v1(37.84,-12.91) 37.834,-12.91 37.834,-13.628 C63.1@37.885,-13.628 ; v1(37.84,-12.11) 38.24,-12.51 ; C49.1@38.481,-25.146 38.481,-24.638 38.608,-24.511 38.608,-24.142 v1(38.64,-24.11) ; C62.1@38.901,-13.628 C62.1@39.04,-13.628 ; v1(39.44,-20.91) v1(39.44,-20.11) 39.44,-19.216 C52.1@39.748,-19.24 ; C61.1@39.917,-13.628 40.24,-13.305 v1(40.24,-12.91) ; v1(40.24,-12.11) 40.298,-12.128 40.933,-12.763 C60.1@40.933,-13.628 ; C73.2@40.487,-6.199 C73.2@40.806,-6.097 ; C54.1@41.949,-19.216 C55.1@43.092,-19.216 43.092,-19.002 43.932,-19.002 v1(44.24,-19.31) v1(45.04,-19.31) ; C56.1@43.092,-17.057 43.426,-17.391 43.921,-17.391 v1(44.24,-17.709) ; C59.1@43.092,-13.628 43.44,-13.28 v1(43.44,-12.91) ; v1(48.24,-23.31) 48.826,-23.31 C57.1@48.895,-23.241
  Secondary Side w0.305: v1(37.04,-18.51) 37.141,-18.51 C51.1@37.706,-17.945
  Secondary Side w0.508: R75.1@30.011,-11.634 30.011,-10.71 v1(30.039,-10.71) ; L3.2@38.647,-6.199 40.487,-6.199 v1(40.487,-7.036)
VDDA_MCU_3V3: C9.2 C10.2 C11.2 C12.2 C13.2 C42.1 C43.1 C44.2 C83.2 L5.2 SW2.1 SW2.4 SW3.1 SW3.4 U1.P6 U1.R6 U6.5 U7.5 U8.5 U9.5 U10.5 U11.5 U12.2 U13.4 | length 42
  Primary Side w0.127: v1(37.04,-20.91) U1.R6@37.44,-20.51 ; v1(37.04,-20.11) U1.P6@37.44,-19.71
  Primary Side w0.135: L5.2@30.646,-18.645 30.646,-19.659 v1(32.245,-19.659) ; v1(38.812,-29.909) 38.89,-29.909 SW2.4@38.89,-28.63 ; SW2.1@38.89,-32.33 38.89,-30.974 v1(38.939,-30.925)
  Primary Side w0.254: U6.5@3.429,-28.423 3.429,-27.637 v1(3.468,-27.598) ; U7.5@7.112,-28.423 7.112,-27.469 v1(7.116,-27.464) ; v1(10.656,-27.446) 10.668,-27.457 U8.5@10.668,-28.423 ; U9.5@14.224,-28.423 14.224,-27.534 v1(14.263,-27.495) ; v1(17.768,-27.496) 17.78,-27.508 U10.5@17.78,-28.423 ; U11.5@21.463,-28.423 21.463,-27.457 v1(21.488,-27.432) ; v1(31.902,-30.48) 31.905,-30.483 SW3.1@31.905,-32.33 ; v1(31.902,-29.87) 31.905,-29.87 SW3.4@31.905,-28.63
  Primary Side w0.305: v1(23.341,-23.389) 23.722,-23.77 23.722,-23.812 U13.4@24.892,-23.812 ; U12.2@25.019,-28.885 26.213,-28.885 26.518,-29.19 v1(26.518,-30.378)
  Secondary Side w0.254: v1(3.468,-27.598) 4.103,-26.963 C10.2@5.246,-26.963 6.615,-26.963 v1(7.116,-27.464) ; v1(10.656,-27.446) 10.656,-26.911 10.834,-26.733 14.009,-26.733 ; C11.2@12.485,-26.963 12.485,-26.733 14.009,-26.733 ; v1(14.263,-27.495) 14.263,-26.987 14.009,-26.733 ; v1(17.768,-27.496) 17.768,-27.038 17.946,-26.86 19.597,-26.86 C12.2@19.597,-27.09 19.827,-26.86 21.248,-26.86 21.488,-27.063 v1(21.488,-27.432) ; C43.1@24.232,-29.985 24.232,-29.896 C42.1@25.73,-29.896 ; C83.2@31.166,-19.977 31.166,-19.738 32.166,-19.738 v1(32.245,-19.659) ; v1(37.04,-20.91) 37.046,-20.904 C44.2@37.719,-20.904 ; v1(37.04,-20.11) 37.319,-20.11 C13.2@37.719,-19.71
  Secondary Side w0.305: v1(23.341,-23.389) C9.2@23.341,-22.602 ; C42.1@25.73,-29.896 26.416,-29.896 26.518,-29.997 v1(26.518,-30.378)
VDDOSC_MCU_3V3: C76.2 C77.2 C92.2 L6.2 U1.H16 U1.H17 | length 7.9
  Primary Side w0.254: U1.H16@45.44,-14.91 v1(45.84,-14.51) ; U1.H17@46.24,-14.91 v1(46.64,-14.51)
  Secondary Side w0.254: v1(49.289,-9.843) 50.839,-9.843 C77.2@50.839,-9.818 ; C76.2@50.839,-10.961 C77.2@50.839,-9.818 ; L6.2@51.157,-6.135 51.004,-6.287 C92.2@51.004,-8.421 50.839,-8.421 C77.2@50.839,-9.818 ; C77.2@50.839,-9.818 50.839,-9.867 50.79,-9.818 C77.2@50.839,-9.818
pads on no net: A:J1.10 A:J1.11 A:U2.2 A:U4.22 A:U4.23 A:U4.26 A:U4.27 A:U4.29 A:U4.30 A:U4.33 A:U4.34 A:U4.43 A:U4.44 A:U4.45 A:U4.46 A:U4.48 A:U4.52 A:U4.53 A:U4.57 A:U4.58 A:U4.59 A:U9.3 A:U9.5 A:U9.7 A:U10.6 D4.5 J1.13 J1.16 J1.29 J1.32 J1.41 J1.43 J1.44 J1.66 J1.113 J1.114 J1.115 J1.116 J1.117 J1.118 J1.119 J1.136 J1.171 J1.172 J1.173 J1.174 J1.175 J1.176 J1.177 J1.178 J9.61 J9.62 J9.63 U1.A12 U1.A13 U1.B3 U1.B9 U1.B10 U1.B12 U1.B13 U1.C4 U1.C5 U1.C10 U1.C12 U1.C13 U1.D5 U1.D10 U1.D12 U1.D13 U1.D14 U1.D17 U1.D18 U1.E17 U1.F17 U1.F18 U1.H4 U1.L19 U1.M18 U1.M19 U1.N19 U1.T10 U1.T19 U1.U9 U1.U10 U1.U18 U1.V9 U1.V10 U1.V13 U1.V18 U1.W9 U1.W12 U1.W18 U12.1 U12.3 U12.7 U12.8 U13.8 U13.9 U14.11 U14.12 U14.13 U14.14
copper on no net: | length 7.4
  Secondary Side w0.152: 96.266,-33.401 97.536,-34.671 ; 97.799,-34.036 ccw(c96.901,-34.036) 97.799,-34.036

## Polygon pours and split planes (outlines as drawn)
$$$25123 on Primary Side "Primary Side-$$$25123" (solid, remove dead copper, pour order 0): 3.81,6.985 -5.969,6.985 -5.969,-4.191 3.81,-4.191
VDD_3V3 on Inner Layer 6 (split plane): 32.637,-19.664 32.637,-19.677 32.646,-19.726 32.674,-19.768 32.716,-19.797 32.766,-19.806 37.341,-19.806 37.341,-22.854 37.35,-22.904 37.379,-22.946 37.421,-22.974 37.47,-22.984 38.115,-22.984 38.115,-23.634 37.46,-23.634 37.41,-23.644 37.368,-23.672 37.34,-23.714 37.33,-23.764 37.33,-25.4 37.34,-25.45 37.368,-25.492 37.41,-25.52 37.46,-25.529 40.311,-25.529 40.32,-25.542 40.362,-25.57 40.411,-25.58 41.654,-25.58 41.654,-27.711 41.654,-33.717 -1.152,-33.717 -1.152,-31.143 -1.16,-31.043 -1.183,-30.946 -1.222,-30.854 -1.274,-30.769 -1.339,-30.693 -1.415,-30.628 -1.5,-30.575 -1.592,-30.537 -1.689,-30.514 -1.789,-30.506 -6.067,-30.506 -6.067,-22.761 2.286,-22.761 2.336,-22.751 2.378,-22.723 2.406,-22.681 2.415,-22.631 2.415,-22.151 22.606,-22.151 22.656,-22.141 22.698,-22.113 22.726,-22.071 22.735,-22.022 22.735,-19.814 28.778,-19.814 28.828,-19.805 28.87,-19.777 28.898,-19.735 28.908,-19.685 28.908,-19.306 30.404,-19.306 30.453,-19.297 30.477,-19.281 32.637,-19.281
VDD_3V3 on Inner Layer 6 (split plane): 17.78,7.115 17.78,-17.145 17.145,-17.78 -6.067,-17.78 -6.067,7.115
VDD_3V3 on Inner Layer 6 (split plane): 98.488,7.115 98.488,-23.112 74.094,-23.112 74.094,-17.907 74.084,-17.857 74.056,-17.815 74.014,-17.787 73.965,-17.778 54.28,-17.778 54.23,-17.787 54.188,-17.815 54.16,-17.857 54.15,-17.907 54.15,-27.582 41.912,-27.582 41.912,-25.4 41.903,-25.35 41.875,-25.308 41.833,-25.28 41.783,-25.271 40.541,-25.271 40.541,-19.51 43.279,-19.51 43.279,-24.105 43.289,-24.154 43.317,-24.196 43.359,-24.224 43.409,-24.234 48.92,-24.234 48.97,-24.224 49.012,-24.196 49.04,-24.154 49.05,-24.105 49.05,-16.703 50.94,-16.703 50.99,-16.694 51.032,-16.666 51.037,-16.657 51.044,-16.652 51.072,-16.61 51.082,-16.561 51.082,-6.401 51.072,-6.351 51.044,-6.309 51.002,-6.281 50.952,-6.271 29.312,-6.271 29.262,-6.281 29.22,-6.309 29.192,-6.351 29.182,-6.401 29.182,-6.414 29.182,-11.684 29.192,-11.734 29.22,-11.776 29.262,-11.804 29.312,-11.813 30.249,-11.813 30.249,-19.022 28.778,-19.022 28.729,-19.032 28.687,-19.06 28.659,-19.102 28.649,-19.152 28.649,-19.177 28.649,-19.556 22.606,-19.556 22.556,-19.565 22.514,-19.593 22.486,-19.635 22.477,-19.685 22.477,-21.892 2.261,-21.892 2.211,-21.902 2.169,-21.93 2.141,-21.972 2.131,-22.022 2.131,-22.502 -6.067,-22.502 -6.067,-20.32 19.799,-20.32 20.32,-19.799 20.32,7.115
VDD_3V3 on Inner Layer 6 (split plane): 178 vertices, not listed, extent -3.133,-42.698 98.488,-18.036
VDD_3V3 on Inner Layer 6 (split plane): 48.017,-13.524 42.05,-13.524 42,-13.533 41.958,-13.561 41.93,-13.603 41.921,-13.653 41.921,-16.93 41.921,-16.955 41.93,-17.005 41.958,-17.047 42,-17.075 42.05,-17.084 48.779,-17.084 48.779,-23.963 43.551,-23.963 43.551,-19.368 43.541,-19.318 43.513,-19.276 43.471,-19.248 43.422,-19.239 40.374,-19.239 40.324,-19.248 40.282,-19.276 40.254,-19.318 40.244,-19.368 40.244,-25.271 37.594,-25.271 37.594,-23.911 38.247,-23.911 38.297,-23.901 38.339,-23.873 38.367,-23.831 38.377,-23.782 38.377,-22.842 38.367,-22.792 38.339,-22.75 38.297,-22.722 38.247,-22.712 37.612,-22.712 37.612,-19.664 37.602,-19.615 37.574,-19.573 37.532,-19.545 37.483,-19.535 32.895,-19.535 32.895,-19.152 32.886,-19.102 32.858,-19.06 32.816,-19.032 32.766,-19.022 30.533,-19.022 30.533,-11.684 30.523,-11.634 30.495,-11.592 30.453,-11.564 30.404,-11.555 29.441,-11.555 29.441,-6.543 48.017,-6.543
VDD_3V3 on Inner Layer 6 (split plane): 50.811,-16.431 48.92,-16.431 48.871,-16.441 48.829,-16.469 48.823,-16.478 48.816,-16.482 48.788,-16.524 48.779,-16.574 48.779,-16.8 42.179,-16.8 42.179,-13.782 48.146,-13.782 48.196,-13.773 48.238,-13.745 48.266,-13.703 48.275,-13.653 48.275,-6.543 50.811,-6.543
GND on Inner Layer 2 (split plane): 222 vertices, not listed, extent -6.067,-42.698 98.488,7.115
GND on Inner Layer 2 (split plane): 17.78,7.115 17.78,-17.145 17.145,-17.78 -6.067,-17.78 -6.067,7.115
GND on Inner Layer 5 (split plane): 186 vertices, not listed, extent -5.941,-41.273 98.321,6.97
EMU_1V8 on Inner Layer 5 (split plane): 17.625,-17.218 17.193,-17.651 -5.916,-17.651 -5.916,6.97 17.625,6.97
VDD_1V2 on Inner Layer 5 (split plane): 88.263,-34.161 82.806,-34.161 82.806,-14.097 82.797,-14.047 82.769,-14.005 82.727,-13.977 82.677,-13.968 58.777,-13.968 58.777,-9.064 58.767,-9.014 58.739,-8.972 58.697,-8.944 58.647,-8.934 54.866,-8.934 54.866,-7.749 88.263,-7.749
VDD_MCU_1V2 on Inner Layer 5 (split plane): 58.213,-13.862 54.483,-13.862 54.433,-13.872 54.391,-13.9 54.363,-13.942 54.354,-13.991 54.354,-26.287 39.753,-26.287 39.753,-17.526 39.744,-17.476 39.716,-17.434 39.674,-17.406 39.624,-17.397 35.816,-17.397 35.816,-11.686 51.308,-11.686 51.358,-11.677 51.4,-11.649 51.428,-11.607 51.437,-11.557 51.437,-9.527 58.213,-9.527
EMU_5V0 on Inner Layer 9 (split plane): 199 vertices, not listed, extent -6.067,-42.698 98.488,7.115
EMU_5V0 on Inner Layer 9 (split plane): 98.488,7.115 98.488,-21.144 90.058,-21.144 90.058,-1.08 90.049,-1.03 90.021,-0.988 89.979,-0.96 89.929,-0.951 62.279,-0.951 62.23,-0.96 62.188,-0.988 62.16,-1.03 62.15,-1.08 62.15,-2.94 52.085,-2.94 52.085,-0.699 52.076,-0.649 52.048,-0.607 52.006,-0.579 51.956,-0.57 39.385,-0.57 39.385,7.115
EMU_5V0 on Inner Layer 9 (split plane): 17.78,7.115 17.78,-17.145 17.145,-17.78 -6.067,-17.78 -6.067,7.115

## Keep-outs
Keep-Out Layer:
  lines w0.254: -3.364,-35.359 -3.77,-35.359 -3.77,-37.341 0.725,-37.341 0.725,-43.335 24.147,-43.335 24.147,-38.331 cw(c25.341,-38.331) 26.535,-38.331 26.535,-43.335 53.176,-43.335 53.176,-37.341 57.672,-37.341 57.672,-35.334 57.266,-35.334 ; -3.363,-35.36 ccw(c-2.766,-34.57) -1.776,-34.521 -1.789,-34.521 -1.789,-31.143 -6.64,-31.143 -6.64,7.752 99.125,7.752 99.125,-37.338 97.464,-37.338 97.464,-43.233 72.183,-43.233 72.183,-31.143 55.666,-31.143 55.666,-32.068 ; 57.267,-35.334 cw(c56.669,-34.543) 55.678,-34.547 55.666,-34.547 55.666,-32.068 ; 55.666,-32.068 55.666,-32.068